# Altium PCB board.PcbDoc
Units mm, origin at the board's own origin, x right, y up, seen from the top; angles counter-clockwise.
Board outline 19.23 x 8.99 mm, 2 copper layers (Top Layer, Bottom Layer); 5 components, 4 nets, 11 pads, 0 vias.
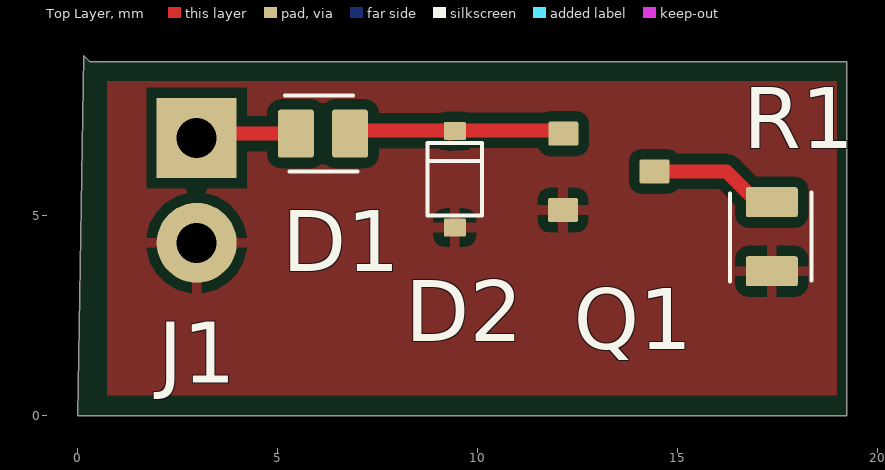
[diagram p0: Top Layer view]
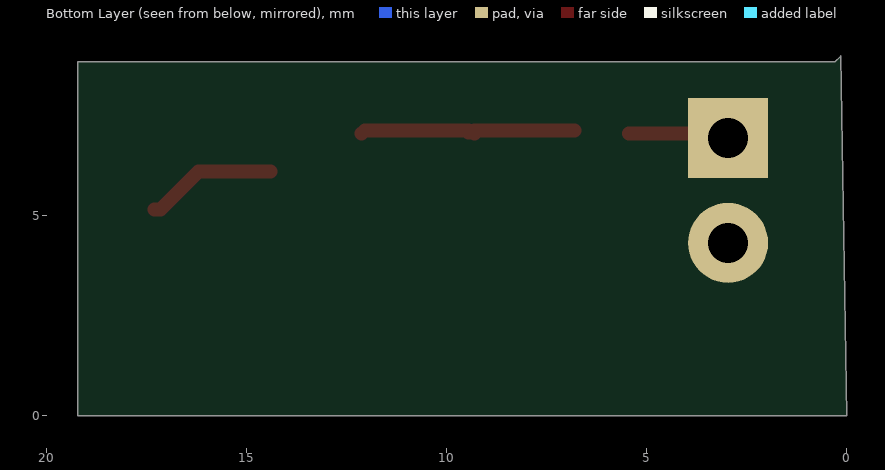
[diagram p1: Bottom Layer view, seen from below]
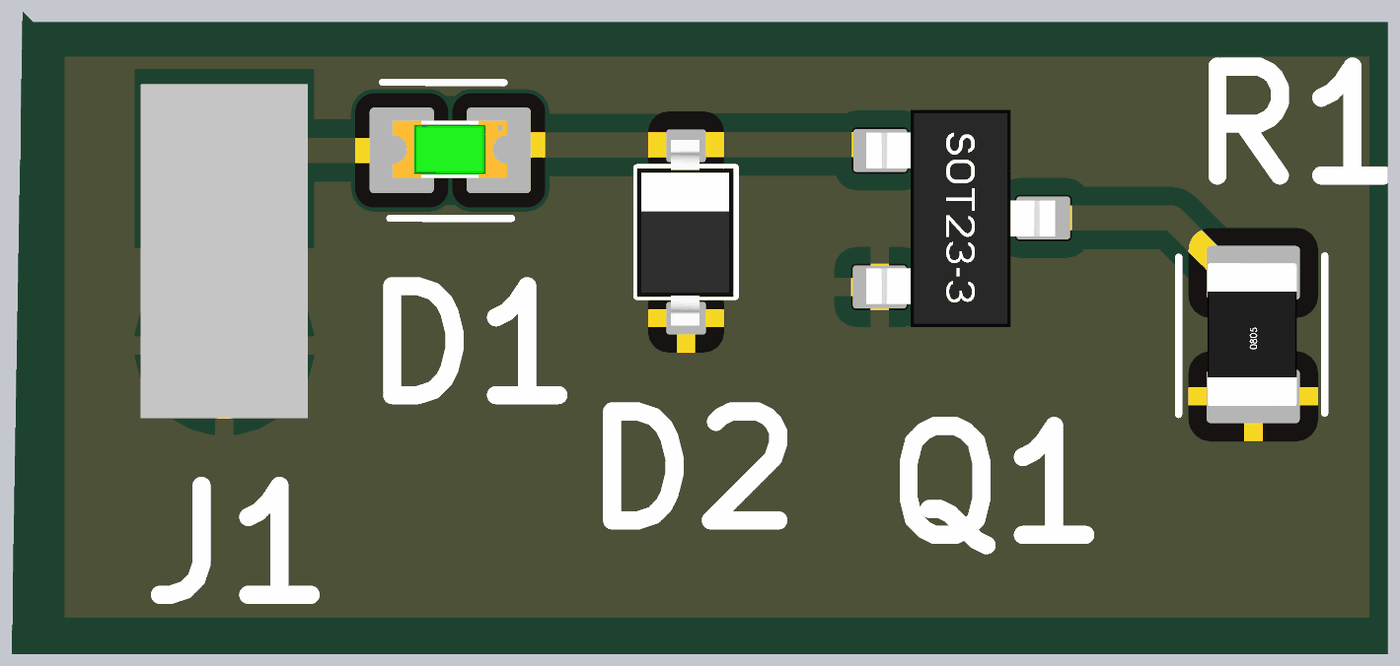
[diagram p2: 3D render of the assembled board from above, using the file's embedded part models]

## Layer stack, top to bottom
Top Solder: solder mask 0.0102, Solder Resist, Dk 3.5
Top Layer: signal copper 0.0356
Dielectric 1: dielectric 0.32, FR-4, Dk 4.8
Bottom Layer: signal copper 0.0356
Bottom Solder: solder mask 0.0102, Solder Resist, Dk 3.5

## Board outline
0.152,8.992 0.305,8.839 19.228,8.839 19.228,0 0,0

## Design rules (kind name [scope] priority, off if disabled: settings)
Clearance [All] p1: gap=0.254 ignorepadtopadclearanceinfootprint=FALSE except(0: Arc-Hole Track-Hole SMDPad-Hole THPad-Hole Via-Hole Fill-Hole Poly-Hole Region-Hole Text-Hole)
PolygonConnect [All] p1: connectstyle=Relief reliefconductorwidth=0.254 reliefentries=4 polygonreliefangle="90 Angle" airgapwidth=0.254
RoutingVias [All] p1: holewidth=0.711 width=1.27 viastyle="Through Hole" minholewidth=0.711 minwidth=1.27 maxholewidth=0.711 maxwidth=1.27
SolderMaskExpansion [All] p1: expansion=0.102 istentingtop=FALSE
Width [All] p1: maxlimit=0.4 minlimit=0.254 preferedwidth=0.35
30 further rules are at their usual default settings.

## Components (designator, comment, footprint, x,y, rotation, side; value= is the part's Value field where it differs from the comment)
D1 "LED" "LED_0603 IPC-A" 6.121,7.061 r0 top
D2 "Zener diode" "SOD-323 IPC-C" 9.423,5.893 r90 top
J1 "2x1 Header" 2.54mm_1mm_1x2 2.972,5.613 r270 top
Q1 "E-MOSFET N" "SOT-23 IPC-C" 13.31,6.121 r270 top
R1 "Resistor" "RES_0805 IPC-C" 17.297,4.47 r90 top value="1k 1/10W"

## Footprints (in the part's own frame and the unit in brackets; to place one, negate y for a bottom-side part, rotate by r counter-clockwise, add the part's x,y. Pads: shape width x height; smd on the part's side, far side on the other; paste and mask are expansions set on the pad)
2.54mm_1mm_1x2 [mm]
  rect 2x2 hole 1 mask+0.025: 1(-1.321,0)
  round 2 hole 1 mask+0.025: 2(1.297,0)
  body extent -2.36,-1.17 2.31,1.17, height 10.58
"LED_0603 IPC-A" [mm]
  rrect15% 0.9x1.2 smd paste+0 mask+0.2: 1(-0.671,-0.014) 2(0.684,-0.014)
  silkscreen extent -0.94,-0.97 0.86,0.94, body extent -0.8,-0.4 0.8,0.4, height 0.6
"RES_0805 IPC-C" [mm]
  rrect15% 0.75x1.3 smd paste+0 mask+0.254: 1(-0.864,-0.051) 2(0.864,-0.051)
  silkscreen extent -1.12,-1.05 1.1,0.99, body extent -1,-0.66 1,0.59, height 0.6
"SOD-323 IPC-C" [mm]
  rrect15% 0.45x0.55 smd paste+0 mask+0.254: 1(-1.194,0) 2(1.219,0)
  silkscreen extent -0.89,-0.69 0.91,0.69, body extent -1.3,-0.66 1.3,0.69, height 1.1
"SOT-23 IPC-C" [mm]
  rrect15% 0.6x0.75 smd paste+0 mask+0.025: 1(-0.925,-1.173) 2(0.985,-1.181) 3(0.02,1.105)
  body extent -1.49,-1.37 1.55,1.27, height 0.94

## Nets (pads, with @x,y where several pads share a name; then routed paths per layer and width w, separated by ;. In a path a pad name is that pad's centre, name@x,y a point inside that pad or via, vN(x,y) a via of type N, cw(c..) or ccw(c..) an arc to the next point about the centre after c; other vN are vias at no path point)
GND: D2.1 J1.2 Q1.2 R1.1
NetD1_1: D1.1 J1.1 | length 2.5
  Top Layer w0.35: J1.1 3.085,7.047 D1.1
NetD1_2: D1.2 D2.2 Q1.1 | length 5.4
  Top Layer w0.35: D1.2@6.806,7.123 D2.2@9.309,7.123 ; D2.2@9.309,7.047 9.373,7.112 D2.2 D2.2@9.456,7.079 ; D2.2@9.456,7.13 12.053,7.13 Q1.1
NetQ1_3: Q1.3 R1.2 | length 3.3
  Top Layer w0.35: Q1.3 16.215,6.101 17.161,5.155 R1.2@17.311,5.155

## Polygon pours and split planes (outlines as drawn)
GND on Top Layer "GND_L01_P000" (solid, pour order 0): 0.737,8.357 0.737,0.508 18.948,0.508 18.974,0.483 18.974,8.357